# EAGLE board pic (EAGLE 5.01)
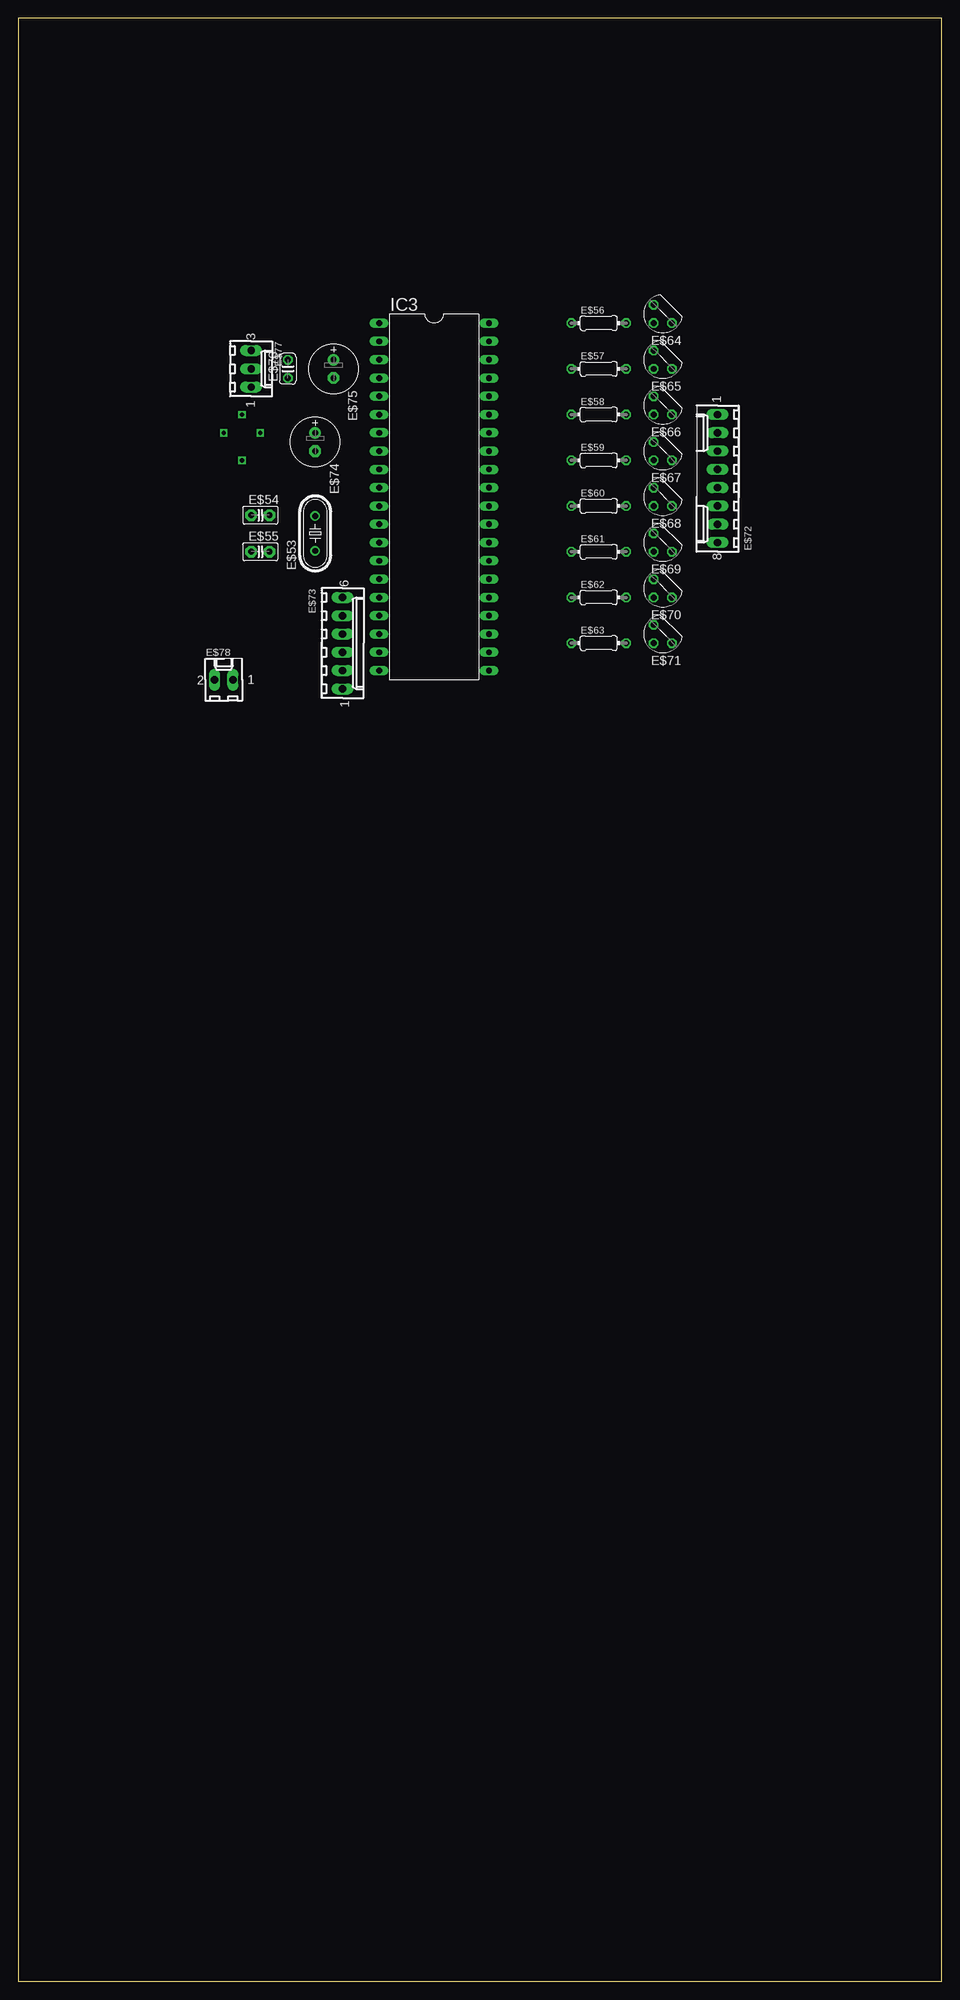
[diagram p0: board, top side]
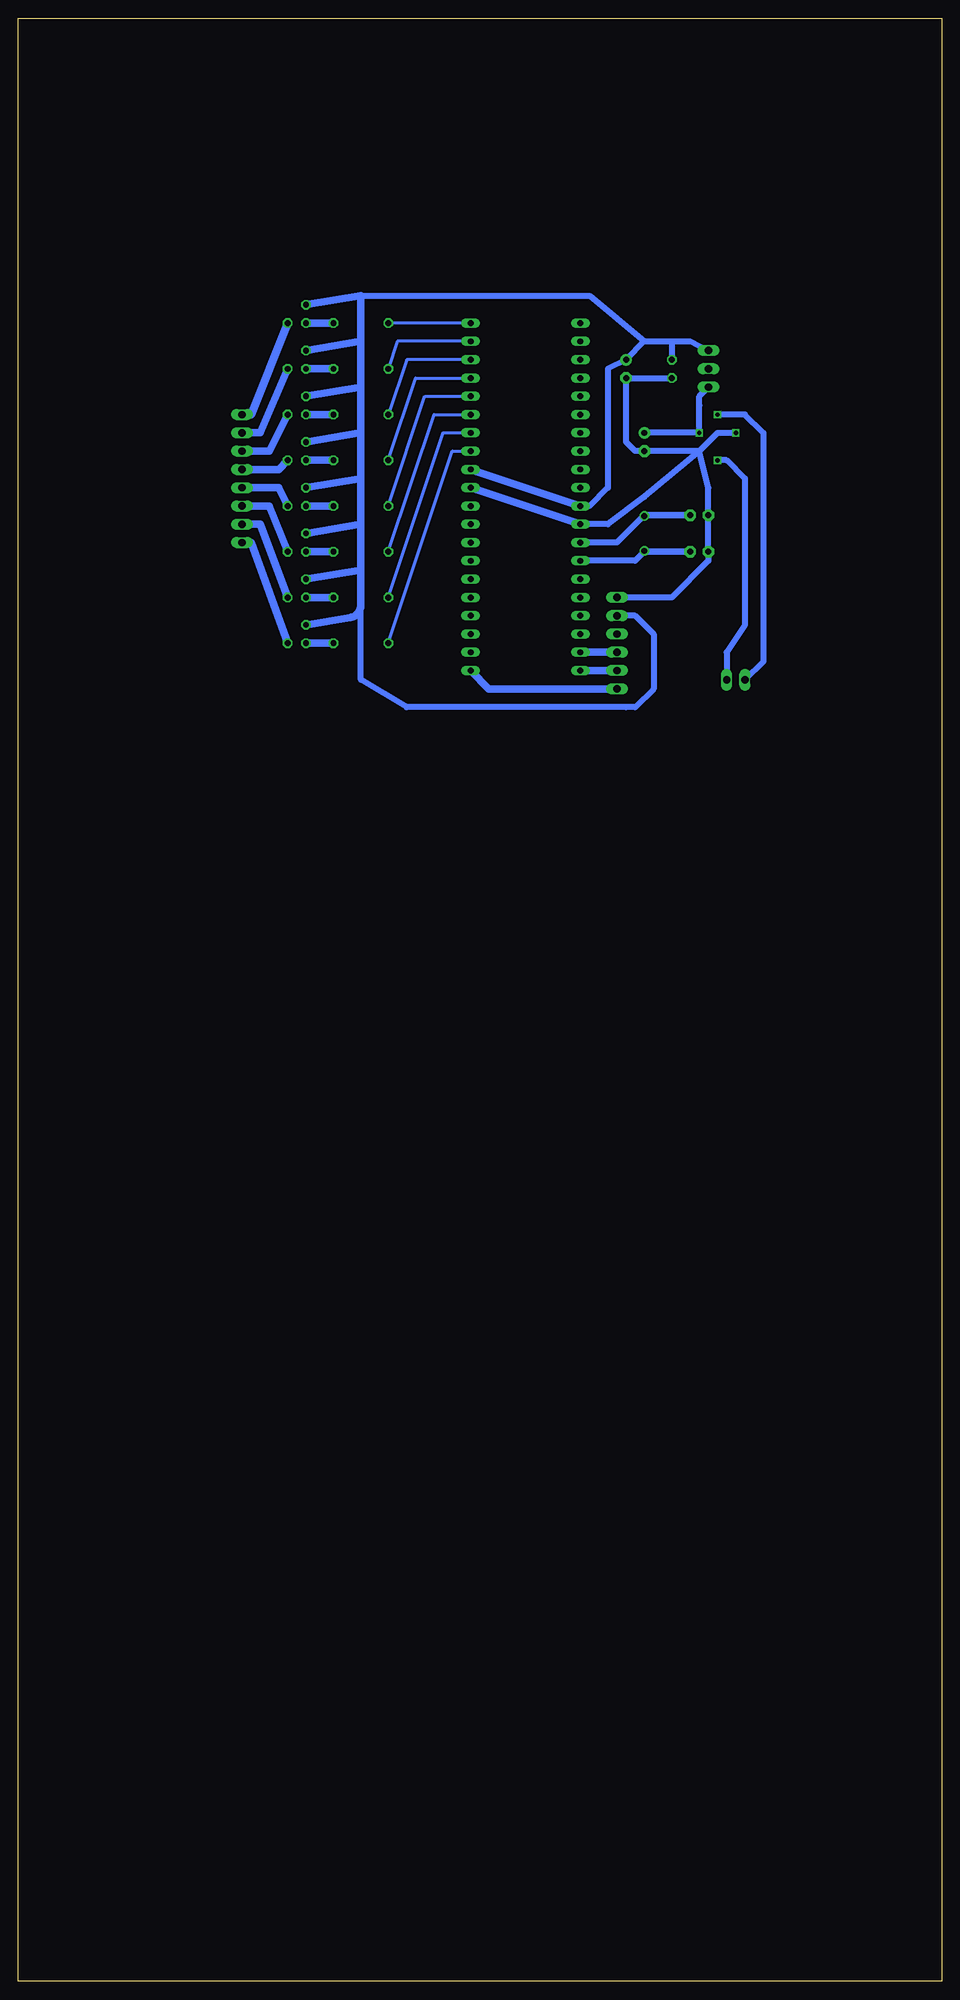
[diagram p1: board, bottom side, seen from below]

Size 128.25 x 272.72 mm. Coordinates in mm from the lower left corner, seen from the top.
Outline: 0,0 128.25,0 128.25,272.72 0,272.72 0,0
Copper layers (1*16): Top 0.035mm / dielectric 1.5mm / Bottom 0.035mm
Design rules "default *": minimum track width 16mil, minimum drill 24mil, track to track 12mil, track to pad 8mil, pad to pad 8mil, via to via 8mil, smd to smd 8mil, copper to edge 40mil, drill to drill 8mil, minimum pad ring 10mil, minimum via ring 8mil, stop-mask expansion 4mil, vias tented up to drill 0mil, thermal gap 10mil

## Footprints (pad centres in the part's own frame; a part is rotated, then mirrored left to right if it is on the bottom)
HC49/S = drill 0.813 round: 1 -2.413,0; 2 2.413,0
C2.5-2 = drill 0.813 pad 1.6 octagon: 1 -1.27,0; 2 1.27,0
0204/7 = drill 0.813 octagon: 1 -3.81,0; 2 3.81,0
TO92/ = drill 0.813 octagon: 1 1.27,-1.27; 2 1.27,1.27; 3 -1.27,1.27
6410-08 = drill 1.016 long: 1 8.89,0; 2 6.35,0; 3 3.81,0; 4 1.27,0; 5 -1.27,0; 6 -3.81,0; 7 -6.35,0; 8 -8.89,0
6410-06 = drill 1.016 long: 1 6.35,0; 2 3.81,0; 3 1.27,0; 4 -1.27,0; 5 -3.81,0; 6 -6.35,0
E2,5-7 = drill 0.813 pad 1.6 round: + -1.27,0 | drill 0.813 pad 1.6 octagon: - 1.27,0
C025-024X044 = drill 0.813 octagon: 1 -1.27,0; 2 1.27,0
6410-03 = drill 1.016 long: 1 2.54,0; 2 0,0; 3 -2.54,0
6410-02 = drill 1.016 long: 1 1.27,0; 2 -1.27,0
DIL40 = drill 0.813 long: 1 -24.13,-7.62; 2 -21.59,-7.62; 3 -19.05,-7.62; 4 -16.51,-7.62; 5 -13.97,-7.62; 6 -11.43,-7.62; 7 -8.89,-7.62; 8 -6.35,-7.62; 9 -3.81,-7.62; 10 -1.27,-7.62; 11 1.27,-7.62; 12 3.81,-7.62; 13 6.35,-7.62; 14 8.89,-7.62; 15 11.43,-7.62; 16 13.97,-7.62; 17 16.51,-7.62; 18 19.05,-7.62; 19 21.59,-7.62; 20 24.13,-7.62; 21 24.13,7.62; 22 21.59,7.62; 23 19.05,7.62; 24 16.51,7.62; 25 13.97,7.62; 26 11.43,7.62; 27 8.89,7.62; 28 6.35,7.62; 29 3.81,7.62; 30 1.27,7.62; 31 -1.27,7.62; 32 -3.81,7.62; 33 -6.35,7.62; 34 -8.89,7.62; 35 -11.43,7.62; 36 -13.97,7.62; 37 -16.51,7.62; 38 -19.05,7.62; 39 -21.59,7.62; 40 -24.13,7.62

## Placement (x,y rotation side)
E$53  [HC49/S]  41.27,201.13 90 top
E$54  [C2.5-2]  33.65,203.67 0 top
E$55  [C2.5-2]  33.65,198.59 0 top
E$56  [0204/7]  80.64,230.34 0 top
E$57  [0204/7]  80.64,223.99 0 top
E$58  [0204/7]  80.64,217.64 0 top
E$59  [0204/7]  80.64,211.29 0 top
E$60  [0204/7]  80.64,204.94 0 top
E$61  [0204/7]  80.64,198.59 0 top
E$62  [0204/7]  80.64,192.24 0 top
E$63  [0204/7]  80.64,185.89 0 top
E$64  [TO92/]  89.53,231.61 180 top
E$65  [TO92/]  89.53,225.26 180 top
E$66  [TO92/]  89.53,218.91 180 top
E$67  [TO92/]  89.53,212.56 180 top
E$68  [TO92/]  89.53,206.21 180 top
E$69  [TO92/]  89.53,199.86 180 top
E$70  [TO92/]  89.53,193.51 180 top
E$71  [TO92/]  89.53,187.16 180 top
E$72  [6410-08]  97.15,208.75 90 top
E$73  [6410-06]  45.08,185.89 270 top
E$74  [E2,5-7]  41.27,213.83 270 top
E$75  [E2,5-7]  43.81,223.99 270 top
E$76  [C025-024X044]  37.46,223.99 90 top
E$77  [6410-03]  32.38,223.99 270 top
E$78  [6410-02]  28.57,180.81 0 top
IC3  PIC16F877P  [DIL40]  57.78,206.21 270 top

## Library data of the parts
E$53 = crystal
E$54 E$55 = capacitor-wima
E$56-E$63 = rcl
E$64-E$71 = transistor
E$72 E$73 E$77 E$78 = con-molex
E$74-E$76 = resistor
IC3 = microchip

## Nets
S$73: E$63.2 E$71.2
S$74: E$62.2 E$70.2
S$75: E$61.2 E$69.2
S$76: E$60.2 E$68.2
S$77: E$59.2 E$67.2
S$78: E$58.2 E$66.2
S$79: E$57.2 E$65.2
S$80: E$56.2 E$64.2
S$81: E$56.1 IC3.40
S$82: E$57.1 IC3.39
S$83: E$58.1 IC3.38
S$84: E$59.1 IC3.37
S$85: E$60.1 IC3.36
S$86: E$67.3 E$72.4
S$87: E$68.3 E$72.5
S$88: E$69.3 E$72.6
S$89: E$70.3 E$72.7
S$90: E$71.3 E$72.8
S$91: E$66.3 E$72.3
S$92: E$65.3 E$72.2
S$93: E$64.3 E$72.1
S$94: E$61.1 IC3.35
S$95: E$62.1 IC3.34
S$96: E$63.1 IC3.33
S$97: E$73.3 IC3.19
S$98: E$73.2 IC3.20
S$99: E$73.1 IC3.21
S$100: E$53.2 E$54.2 IC3.13
S$101: E$53.1 E$55.2 IC3.14
S$103: E$74.+ E$77.1
S$104: E$54.1 E$55.1 E$73.6 E$74.- E$75.- E$76.1 IC3.12 IC3.31
S$105: E$64.1 E$65.1 E$66.1 E$67.1 E$68.1 E$69.1 E$70.1 E$71.1 E$73.5 E$75.+ E$76.2 E$77.3 IC3.11
S$107: E$78.2
S$108: E$78.1

## Tracks (layer width: path | path; a pad name or v marks a point on that pad's centre or on a via)
S$73
  Bottom 0.406: E$63.2 E$71.2
  Bottom 1.016: E$63.2 E$71.2
S$74
  Bottom 0.406: E$62.2 E$70.2
  Bottom 1.016: E$62.2 E$70.2
S$75
  Bottom 0.406: E$61.2 E$69.2
  Bottom 1.016: E$61.2 E$69.2
S$76
  Bottom 0.406: E$60.2 E$68.2
  Bottom 1.016: E$60.2 E$68.2
S$77
  Bottom 0.406: E$59.2 E$67.2
  Bottom 1.016: E$59.2 E$67.2
S$78
  Bottom 0.406: E$58.2 E$66.2
  Bottom 1.016: E$58.2 E$66.2
S$79
  Bottom 0.406: E$57.2 E$65.2
  Bottom 1.016: E$57.2 E$65.2
S$80
  Bottom 0.406: E$56.2 E$64.2
  Bottom 1.016: E$56.2 E$64.2
S$81
  Bottom 0.406: IC3.40 E$56.1
S$82
  Bottom 0.406: E$57.1 75.56,227.8 IC3.39
S$83
  Bottom 0.406: E$58.1 74.29,225.26 IC3.38
S$84
  Bottom 0.406: E$59.1 73.02,222.72 IC3.37
S$85
  Bottom 0.406: E$60.1 71.75,220.18 IC3.36
S$86
  Bottom 1.016: E$67.3 92.07,210.02 E$72.4
S$87
  Bottom 1.016: E$68.3 92.07,207.48 E$72.5
S$88
  Bottom 1.016: E$69.3 93.34,204.94 E$72.6
S$89
  Bottom 1.016: E$70.3 94.61,202.4 E$72.7
S$90
  Bottom 1.016: E$71.3 95.88,199.86 E$72.8
S$91
  Bottom 1.016: E$66.3 93.34,212.56 E$72.3
S$92
  Bottom 1.016: E$65.3 94.61,215.1 E$72.2
S$93
  Bottom 1.016: E$72.1 95.88,217.64 E$64.3
S$94
  Bottom 0.406: E$61.1 70.48,217.64 IC3.35
S$95
  Bottom 0.406: 66.67,215.1 IC3.34 69.21,215.1 E$62.1
S$96
  Bottom 0.406: 66.67,212.56 IC3.33 67.94,212.56 E$63.1
S$97
  Bottom 0.813: E$73.3 IC3.19
  Bottom 1.016: E$73.3 IC3.19
S$98
  Bottom 1.016: IC3.20 E$73.2
S$99
  Bottom 1.016: E$73.1 62.86,179.54 IC3.21
S$100
  Bottom 0.813: IC3.13 45.08,199.86 41.27,203.67
  Bottom 0.889: E$54.2 41.27,203.67 E$53.2
S$101
  Bottom 0.813: IC3.14 42.54,197.32 41.27,198.59
  Bottom 0.889: E$53.1 41.27,198.59 E$55.2
S$102  (via drill 0.6)
  Bottom 0.813: v33.65,215.1 33.65,218.91
S$103
  Bottom 0.813: E$74.+ 33.65,215.1 33.65,220.18 E$77.1
S$104  (via drill 0.6)
  Bottom 0.813: E$76.1 E$75.- 43.81,213.83 42.54,212.56 E$74.- 33.65,212.56 | IC3.12 46.35,202.4 41.27,206.21 33.65,212.56 | v28.57,215.1 31.11,215.1 33.65,212.56 | 33.65,212.56 32.38,207.48 E$54.1 E$55.1 32.38,197.32 37.46,192.24 E$73.6
  Bottom 1.016: IC3.12 IC3.31
S$105
  Bottom 0.813: IC3.11 48.89,204.94 46.35,207.48 46.35,223.99 E$75.+ 41.27,227.8 | E$77.3 34.92,227.8 37.46,227.8 | 37.46,227.8 E$76.2 | 41.27,227.8 37.46,227.8 | 41.27,227.8 48.89,234.15 80.64,234.15 | E$73.5 42.54,189.7 40,187.16 40,179.54 42.54,177 | 80.64,192.24 80.64,180.81 74.29,177 42.54,177 | 42.54,177 43.81,177
  Bottom 1.016: IC3.11 65.4,210.02 | E$64.1 80.64,234.15 80.64,226.53 | E$65.1 80.64,227.8 80.64,226.53 | E$66.1 80.64,221.45 80.64,220.18 | 80.64,220.18 80.64,226.53 | E$67.1 80.64,215.1 80.64,213.83 | 80.64,213.83 80.64,220.18 | E$68.1 80.64,208.75 80.64,207.48 | 80.64,207.48 80.64,213.83 | E$69.1 80.64,202.4 80.64,201.13 | 80.64,201.13 80.64,207.48 | E$70.1 80.64,196.05 80.64,194.78 | E$71.1 82.14,189.45 arc-81 80.64,191.22 80.64,192.24 80.64,194.78 | 80.64,194.78 80.64,201.13
S$107  (via drill 0.6)
  Bottom 0.813: E$78.2 24.76,183.35 24.76,215.1 27.3,217.64 v31.11,217.64
S$108  (via drill 0.6)
  Bottom 0.813: E$78.1 29.84,184.62 27.3,188.43 27.3,208.75 29.84,211.29 v31.11,211.29